# EAGLE board camera_unit (EAGLE 7.5.0)
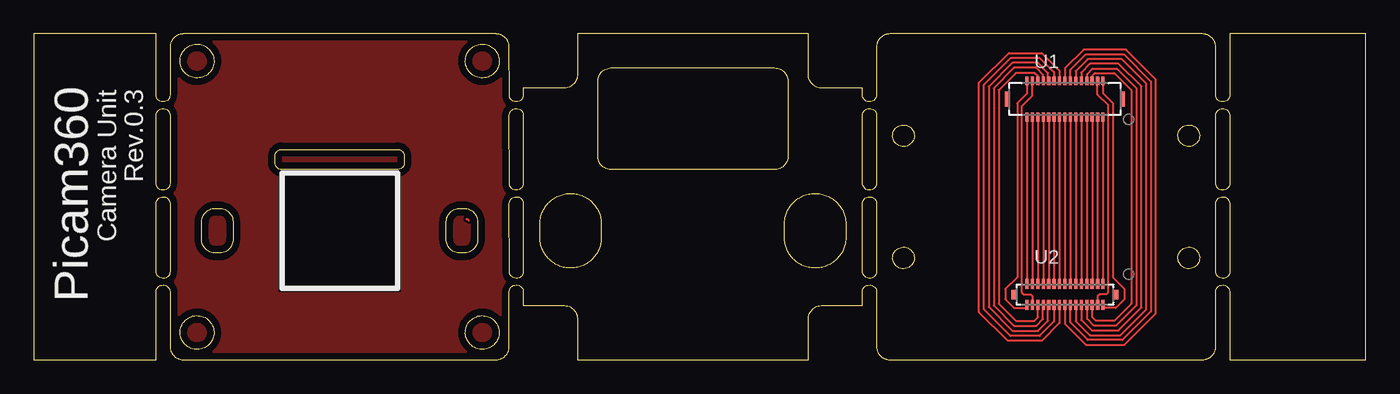
[diagram p0: board, top side]
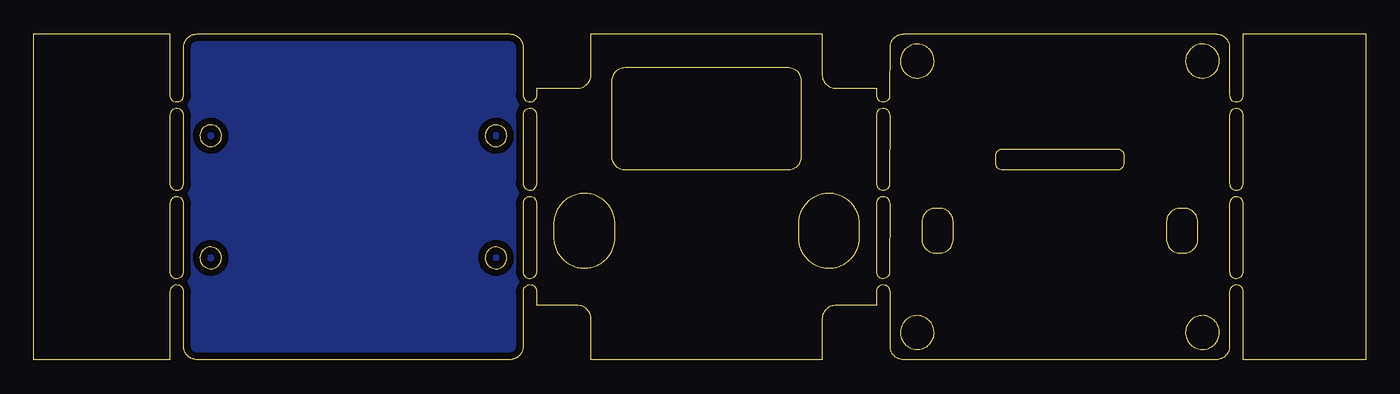
[diagram p1: board, bottom side, seen from below]

Size 98.01 x 24 mm. Coordinates in mm from the lower left corner, seen from the top.
Outline: 8.98,5.01 8.99,5.09 9.03,5.21 9.09,5.31 9.17,5.4 9.28,5.46 9.39,5.49 9.53,5.5 9.58,5.5 9.69,5.47 9.8,5.42 9.89,5.34 9.96,5.24 10,5.13 10.02,5.01 10.02,0.83 10.03,0.75 10.05,0.69 10.07,0.63 10.1,0.57 10.12,0.52 10.16,0.46 10.19,0.41 10.23,0.36 10.27,0.32 10.32,0.27 10.36,0.23 10.41,0.19 10.46,0.16 10.52,0.12 10.57,0.1 10.63,0.07 10.69,0.05 10.75,0.03 10.81,0.02 10.88,0.01 10.94,0 11,0 34,0 34.06,0 34.12,0.01 34.19,0.02 34.25,0.03 34.31,0.05 34.37,0.07 34.43,0.1 34.48,0.12 34.54,0.16 34.59,0.19 34.64,0.23 34.68,0.27 34.73,0.32 34.77,0.36 34.81,0.41 34.84,0.46 34.88,0.52 34.91,0.57 34.93,0.63 34.95,0.69 34.97,0.75 34.98,0.81 34.99,0.85 34.98,5.01 34.99,5.09 35.03,5.21 35.09,5.31 35.17,5.4 35.28,5.46 35.39,5.49 35.52,5.5 35.58,5.5 35.69,5.47 35.8,5.42 35.89,5.34 35.96,5.24 36,5.13 36.02,5.01 36.02,4 39.05,4 39.17,3.98 39.29,3.96 39.41,3.91 39.52,3.86 39.62,3.79 39.71,3.71 39.79,3.62 39.86,3.52 39.91,3.41 39.96,3.29 39.98,3.17 40,3.05 40,3 40,0 57,0 57,3 57,3.05 57.02,3.17 57.04,3.29 57.09,3.41 57.14,3.52 57.21,3.62 57.29,3.71 57.38,3.79 57.48,3.86 57.59,3.91 57.71,3.96 57.83,3.98 57.95,4 60.99,4 60.98,5.01 60.99,5.09 61.03,5.21 61.09,5.31 61.17,5.4 61.28,5.46 61.39,5.49 61.52,5.5 61.58,5.5 61.69,5.47 61.8,5.42 61.89,5.34 61.96,5.24 62,5.13 62.02,5.01 62.02,0.83 62.03,0.75 62.05,0.69 62.07,0.63 62.09,0.57 62.12,0.52 62.16,0.46 62.19,0.41 62.23,0.36 62.27,0.32 62.32,0.27 62.36,0.23 62.41,0.19 62.46,0.16 62.52,0.12 62.57,0.1 62.63,0.07 62.69,0.05 62.75,0.03 62.81,0.02 62.88,0.01 62.94,0 63,0 86,0 86.06,0 86.12,0.01 86.19,0.02 86.25,0.03 86.31,0.05 86.37,0.07 86.43,0.1 86.48,0.12 86.54,0.16 86.59,0.19 86.64,0.23 86.68,0.27 86.73,0.32 86.77,0.36 86.81,0.41 86.84,0.46 86.88,0.52 86.91,0.57 86.93,0.63 86.95,0.69 86.97,0.75 86.98,0.81 86.99,0.85 86.98,5.01 86.99,5.09 87.03,5.21 87.09,5.31 87.17,5.4 87.28,5.46 87.39,5.49 87.53,5.5 87.58,5.5 87.69,5.47 87.8,5.42 87.89,5.34 87.96,5.24 88,5.13 88.02,5.01 88.02,0 98.01,0 98.01,24 88.02,24 88.02,19.49 88.01,19.41 87.97,19.29 87.91,19.19 87.83,19.1 87.72,19.04 87.61,19.01 87.47,19 87.36,19.01 87.25,19.05 87.15,19.12 87.07,19.21 87.02,19.31 86.99,19.43 86.99,23.16 86.98,23.19 86.97,23.25 86.95,23.31 86.93,23.37 86.91,23.43 86.88,23.48 86.84,23.54 86.81,23.59 86.77,23.64 86.73,23.68 86.68,23.73 86.64,23.77 86.59,23.81 86.54,23.84 86.48,23.88 86.43,23.91 86.37,23.93 86.31,23.95 86.25,23.97 86.19,23.98 86.12,23.99 86.06,24 86,24 63,24 62.94,24 62.88,23.99 62.81,23.98 62.75,23.97 62.69,23.95 62.63,23.93 62.57,23.91 62.52,23.88 62.46,23.84 62.41,23.81 62.36,23.77 62.32,23.73 62.27,23.68 62.23,23.64 62.19,23.59 62.16,23.54 62.12,23.48 62.09,23.43 62.07,23.37 62.05,23.31 62.03,23.25 62.02,23.17 62.02,19.49 62.01,19.41 61.97,19.29 61.91,19.19 61.83,19.1 61.72,19.04 61.61,19.01 61.48,19 61.37,19.01 61.25,19.05 61.15,19.12 61.07,19.21 61.02,19.31 60.99,19.43 60.99,20 58,20 57.95,20 57.83,20.02 57.71,20.04 57.59,20.09 57.48,20.14 57.38,20.21 57.29,20.29 57.21,20.38 57.14,20.48 57.09,20.59 57.04,20.71 57.02,20.83 57,20.95 57,24 40,24 40,20.95 39.98,20.83 39.96,20.71 39.91,20.59 39.86,20.48 39.79,20.38 39.71,20.29 39.62,20.21 39.52,20.14 39.41,20.09 39.29,20.04 39.17,20.02 39.05,20 39,20 36.02,20 36.02,19.49 36.01,19.41 35.97,19.29 35.91,19.19 35.83,19.1 35.72,19.04 35.61,19.01 35.48,19 35.37,19.01 35.25,19.05 35.15,19.12 35.07,19.21 35.02,19.31 34.99,19.43 34.99,23.16 34.98,23.19 34.97,23.25 34.95,23.31 34.93,23.37 34.91,23.43 34.88,23.48 34.84,23.54 34.81,23.59 34.77,23.64 34.73,23.68 34.68,23.73 34.64,23.77 34.59,23.81 34.54,23.84 34.48,23.88 34.43,23.91 34.37,23.93 34.31,23.95 34.25,23.97 34.19,23.98 34.12,23.99 34.06,24 34,24 11,24 10.94,24 10.88,23.99 10.81,23.98 10.75,23.97 10.69,23.95 10.63,23.93 10.57,23.91 10.52,23.88 10.46,23.84 10.41,23.81 10.36,23.77 10.32,23.73 10.27,23.68 10.23,23.64 10.19,23.59 10.16,23.54 10.12,23.48 10.1,23.43 10.07,23.37 10.05,23.31 10.03,23.25 10.02,23.17 10.02,19.49 10.01,19.41 9.97,19.29 9.91,19.19 9.83,19.1 9.72,19.04 9.61,19.01 9.47,19 9.37,19.01 9.25,19.05 9.15,19.12 9.07,19.21 9.02,19.31 8.99,19.43 8.98,24 0,24 0,0 8.99,0 8.98,5.01
Outline: 11.91,20.75 11.78,20.77 11.65,20.8 11.53,20.84 11.41,20.9 11.3,20.96 11.2,21.04 11.1,21.13 11.02,21.23 10.94,21.34 10.88,21.45 10.82,21.57 10.79,21.7 10.76,21.83 10.75,21.96 10.75,22.09 10.77,22.22 10.8,22.34 10.84,22.47 10.9,22.59 10.96,22.7 11.04,22.8 11.13,22.9 11.23,22.98 11.34,23.06 11.45,23.12 11.57,23.18 11.7,23.21 11.83,23.24 11.96,23.25 12.09,23.25 12.22,23.23 12.35,23.2 12.47,23.16 12.59,23.1 12.7,23.04 12.8,22.96 12.9,22.87 12.98,22.77 13.06,22.66 13.12,22.55 13.18,22.43 13.21,22.3 13.24,22.17 13.25,22.04 13.25,21.91 13.23,21.78 13.2,21.66 13.16,21.53 13.1,21.41 13.04,21.3 12.96,21.2 12.87,21.1 12.77,21.02 12.66,20.94 12.55,20.88 12.43,20.82 12.3,20.79 12.17,20.76 12.04,20.75 11.91,20.75
Outline: 32.91,20.75 32.78,20.77 32.66,20.8 32.53,20.84 32.41,20.9 32.3,20.96 32.2,21.04 32.1,21.13 32.02,21.23 31.94,21.34 31.88,21.45 31.82,21.57 31.79,21.7 31.76,21.83 31.75,21.96 31.75,22.09 31.77,22.22 31.8,22.34 31.84,22.47 31.9,22.59 31.96,22.7 32.04,22.8 32.13,22.9 32.23,22.98 32.34,23.06 32.45,23.12 32.57,23.18 32.7,23.21 32.83,23.24 32.96,23.25 33.09,23.25 33.22,23.23 33.34,23.2 33.47,23.16 33.59,23.1 33.7,23.04 33.8,22.96 33.9,22.87 33.98,22.77 34.06,22.66 34.12,22.55 34.17,22.43 34.21,22.3 34.24,22.17 34.25,22.04 34.25,21.91 34.23,21.78 34.2,21.66 34.16,21.53 34.1,21.41 34.04,21.3 33.96,21.2 33.87,21.1 33.77,21.02 33.66,20.94 33.55,20.88 33.43,20.82 33.3,20.79 33.17,20.76 33.04,20.75 32.91,20.75
Outline: 42.45,14 42.33,14.02 42.21,14.04 42.09,14.09 41.98,14.14 41.88,14.21 41.79,14.29 41.71,14.38 41.64,14.48 41.59,14.59 41.54,14.71 41.52,14.83 41.5,14.95 41.5,20.5 41.5,20.55 41.52,20.67 41.54,20.79 41.59,20.91 41.64,21.02 41.71,21.12 41.79,21.21 41.88,21.29 41.98,21.36 42.09,21.41 42.21,21.46 42.33,21.48 42.45,21.5 54.5,21.5 54.6,21.5 54.73,21.47 54.84,21.44 54.95,21.39 55.06,21.33 55.16,21.25 55.24,21.17 55.32,21.07 55.38,20.97 55.43,20.86 55.47,20.74 55.49,20.62 55.5,20.5 55.5,15 55.5,14.95 55.48,14.83 55.46,14.71 55.41,14.59 55.36,14.48 55.29,14.38 55.21,14.29 55.12,14.21 55.02,14.14 54.91,14.09 54.79,14.04 54.67,14.02 54.55,14 42.5,14 42.45,14
Outline: 35.37,12.51 35.25,12.55 35.15,12.62 35.07,12.71 35.02,12.81 34.99,12.93 34.98,18.01 34.99,18.09 35.03,18.21 35.09,18.31 35.17,18.4 35.28,18.46 35.39,18.49 35.52,18.5 35.58,18.5 35.69,18.47 35.8,18.42 35.89,18.34 35.96,18.24 36,18.13 36.02,18.01 36.02,12.99 36.01,12.9 35.97,12.79 35.91,12.69 35.83,12.6 35.72,12.54 35.61,12.51 35.48,12.5 35.37,12.51
Outline: 61.37,12.51 61.25,12.55 61.15,12.62 61.07,12.71 61.02,12.81 60.99,12.93 60.98,18.01 60.99,18.09 61.03,18.21 61.09,18.31 61.17,18.4 61.28,18.46 61.39,18.49 61.52,18.5 61.58,18.5 61.69,18.47 61.8,18.42 61.89,18.34 61.96,18.24 62,18.13 62.02,18.01 62.02,12.99 62.01,12.9 61.97,12.79 61.91,12.69 61.83,12.6 61.72,12.54 61.61,12.51 61.48,12.5 61.37,12.51
Outline: 9.37,12.51 9.25,12.55 9.15,12.62 9.07,12.71 9.02,12.81 8.99,12.93 8.98,18.01 8.99,18.09 9.03,18.21 9.09,18.31 9.17,18.4 9.28,18.46 9.39,18.49 9.53,18.5 9.58,18.5 9.69,18.47 9.8,18.42 9.89,18.34 9.96,18.24 10,18.13 10.02,18.01 10.02,12.99 10.01,12.9 9.97,12.79 9.91,12.69 9.83,12.6 9.72,12.54 9.61,12.51 9.47,12.5 9.37,12.51
Outline: 87.36,12.51 87.25,12.55 87.15,12.62 87.07,12.71 87.02,12.81 86.99,12.93 86.98,18.01 86.99,18.09 87.03,18.21 87.09,18.31 87.17,18.4 87.28,18.46 87.39,18.49 87.53,18.5 87.58,18.5 87.69,18.47 87.8,18.42 87.89,18.34 87.96,18.24 88,18.13 88.02,18.01 88.02,12.99 88.01,12.9 87.97,12.79 87.91,12.69 87.83,12.6 87.72,12.54 87.61,12.51 87.47,12.5 87.36,12.51
Outline: 84.9,15.71 84.78,15.73 84.66,15.78 84.55,15.84 84.45,15.91 84.37,16.01 84.3,16.11 84.25,16.23 84.22,16.35 84.2,16.47 84.21,16.6 84.23,16.72 84.28,16.84 84.34,16.95 84.42,17.05 84.51,17.13 84.61,17.2 84.73,17.25 84.85,17.29 84.97,17.3 85.1,17.29 85.22,17.27 85.34,17.23 85.45,17.16 85.55,17.09 85.63,16.99 85.7,16.89 85.75,16.77 85.78,16.65 85.8,16.53 85.79,16.4 85.77,16.28 85.72,16.16 85.66,16.05 85.58,15.95 85.49,15.87 85.39,15.8 85.27,15.75 85.15,15.71 85.03,15.7 84.9,15.71
Outline: 63.9,15.71 63.78,15.73 63.66,15.78 63.55,15.84 63.45,15.91 63.37,16.01 63.3,16.11 63.25,16.23 63.22,16.35 63.2,16.47 63.21,16.6 63.23,16.72 63.27,16.84 63.34,16.95 63.41,17.05 63.51,17.13 63.61,17.2 63.73,17.25 63.85,17.29 63.97,17.3 64.1,17.29 64.22,17.27 64.34,17.23 64.45,17.16 64.55,17.09 64.63,16.99 64.7,16.89 64.75,16.77 64.78,16.65 64.8,16.53 64.79,16.4 64.77,16.28 64.72,16.16 64.66,16.05 64.58,15.95 64.49,15.87 64.39,15.8 64.27,15.75 64.15,15.71 64.03,15.7 63.9,15.71
Outline: 18.14,14.01 18.02,14.05 17.92,14.12 17.84,14.21 17.78,14.32 17.75,14.44 17.75,15 17.76,15.11 17.8,15.23 17.87,15.33 17.96,15.41 18.07,15.47 18.19,15.5 26.75,15.5 26.8,15.5 26.92,15.47 27.03,15.41 27.12,15.34 27.19,15.23 27.23,15.12 27.25,15 27.25,14.5 27.24,14.39 27.2,14.27 27.13,14.17 27.04,14.09 26.93,14.03 26.81,14 18.25,14 18.14,14.01
Outline: 39.42,6.75 39.3,6.76 39.18,6.77 39.07,6.79 38.95,6.82 38.84,6.85 38.73,6.89 38.62,6.93 38.51,6.98 38.4,7.03 38.3,7.09 38.2,7.16 38.11,7.23 38.02,7.3 37.93,7.38 37.85,7.46 37.77,7.55 37.7,7.65 37.63,7.74 37.57,7.84 37.51,7.94 37.46,8.05 37.41,8.16 37.37,8.27 37.33,8.38 37.3,8.49 37.28,8.61 37.26,8.73 37.25,8.84 37.24,8.96 37.24,10.04 37.25,10.16 37.26,10.27 37.28,10.39 37.3,10.51 37.33,10.62 37.37,10.73 37.41,10.84 37.46,10.95 37.51,11.06 37.57,11.16 37.63,11.26 37.7,11.35 37.77,11.45 37.85,11.53 37.93,11.62 38.02,11.7 38.11,11.77 38.2,11.84 38.3,11.91 38.4,11.97 38.51,12.02 38.62,12.07 38.73,12.11 38.84,12.15 38.95,12.18 39.07,12.21 39.18,12.23 39.3,12.24 39.42,12.25 39.54,12.25 39.66,12.24 39.78,12.23 39.9,12.22 40.01,12.19 40.12,12.16 40.24,12.13 40.35,12.09 40.46,12.04 40.56,11.99 40.66,11.93 40.76,11.87 40.86,11.8 40.95,11.72 41.04,11.65 41.12,11.56 41.2,11.48 41.28,11.38 41.35,11.29 41.41,11.19 41.47,11.09 41.53,10.99 41.58,10.88 41.62,10.77 41.66,10.66 41.69,10.54 41.71,10.43 41.73,10.31 41.75,10.2 41.75,10.08 41.76,10 41.75,8.92 41.75,8.8 41.73,8.69 41.71,8.57 41.69,8.46 41.66,8.34 41.62,8.23 41.58,8.12 41.53,8.01 41.47,7.91 41.41,7.81 41.35,7.71 41.28,7.62 41.2,7.52 41.12,7.44 41.04,7.35 40.95,7.28 40.86,7.2 40.76,7.13 40.66,7.07 40.56,7.01 40.46,6.96 40.35,6.91 40.24,6.87 40.12,6.84 40.01,6.81 39.9,6.78 39.78,6.77 39.66,6.75 39.54,6.75 39.42,6.75
Outline: 57.34,6.75 57.22,6.77 57.1,6.78 56.99,6.81 56.88,6.84 56.76,6.87 56.65,6.91 56.54,6.96 56.44,7.01 56.34,7.07 56.24,7.13 56.14,7.2 56.05,7.28 55.96,7.35 55.88,7.44 55.8,7.52 55.72,7.62 55.65,7.71 55.59,7.81 55.53,7.91 55.47,8.01 55.42,8.12 55.38,8.23 55.34,8.34 55.31,8.46 55.29,8.57 55.27,8.69 55.25,8.8 55.25,8.92 55.24,10 55.25,10.08 55.25,10.2 55.27,10.31 55.29,10.43 55.31,10.54 55.34,10.66 55.38,10.77 55.42,10.88 55.47,10.99 55.53,11.09 55.59,11.19 55.65,11.29 55.72,11.38 55.8,11.48 55.88,11.56 55.96,11.65 56.05,11.72 56.14,11.8 56.24,11.87 56.34,11.93 56.44,11.99 56.54,12.04 56.65,12.09 56.76,12.13 56.88,12.16 56.99,12.19 57.1,12.22 57.22,12.23 57.34,12.24 57.46,12.25 57.58,12.25 57.7,12.24 57.82,12.23 57.93,12.21 58.05,12.18 58.16,12.15 58.27,12.11 58.38,12.07 58.49,12.02 58.6,11.97 58.7,11.91 58.8,11.84 58.89,11.77 58.98,11.7 59.07,11.62 59.15,11.53 59.23,11.45 59.3,11.35 59.37,11.26 59.43,11.16 59.49,11.06 59.54,10.95 59.59,10.84 59.63,10.73 59.67,10.62 59.7,10.51 59.72,10.39 59.74,10.27 59.75,10.16 59.76,10.04 59.76,8.96 59.75,8.84 59.74,8.73 59.72,8.61 59.7,8.49 59.67,8.38 59.63,8.27 59.59,8.16 59.54,8.05 59.49,7.94 59.43,7.84 59.37,7.74 59.3,7.65 59.23,7.55 59.15,7.46 59.07,7.38 58.98,7.3 58.89,7.23 58.8,7.16 58.7,7.09 58.6,7.03 58.49,6.98 58.38,6.93 58.27,6.89 58.16,6.85 58.05,6.82 57.93,6.79 57.82,6.77 57.7,6.76 57.58,6.75 57.46,6.75 57.34,6.75
Outline: 35.37,6.01 35.25,6.05 35.15,6.12 35.07,6.21 35.02,6.31 34.99,6.43 34.98,11.51 34.99,11.6 35.03,11.71 35.09,11.81 35.17,11.9 35.28,11.96 35.39,11.99 35.52,12 35.58,12 35.69,11.97 35.8,11.92 35.89,11.84 35.96,11.74 36,11.63 36.02,11.51 36.02,6.49 36.01,6.41 35.97,6.29 35.91,6.19 35.83,6.1 35.72,6.04 35.61,6.01 35.48,6 35.37,6.01
Outline: 61.37,6.01 61.25,6.05 61.15,6.12 61.07,6.21 61.02,6.31 60.99,6.43 60.98,11.51 60.99,11.6 61.03,11.71 61.09,11.81 61.17,11.9 61.28,11.96 61.39,11.99 61.52,12 61.58,12 61.69,11.97 61.8,11.92 61.89,11.84 61.96,11.74 62,11.63 62.02,11.51 62.02,6.49 62.01,6.41 61.97,6.29 61.91,6.19 61.83,6.1 61.72,6.04 61.61,6.01 61.48,6 61.37,6.01
Outline: 9.37,6.01 9.25,6.05 9.15,6.12 9.07,6.21 9.02,6.31 8.99,6.43 8.98,11.51 8.99,11.6 9.03,11.71 9.09,11.81 9.17,11.9 9.28,11.96 9.39,11.99 9.53,12 9.58,12 9.69,11.97 9.8,11.92 9.89,11.84 9.96,11.74 10,11.63 10.02,11.51 10.02,6.49 10.01,6.41 9.97,6.29 9.91,6.19 9.83,6.1 9.72,6.04 9.61,6.01 9.47,6 9.37,6.01
Outline: 87.36,6.01 87.25,6.05 87.15,6.12 87.07,6.21 87.02,6.31 86.99,6.43 86.98,11.51 86.99,11.6 87.03,11.71 87.09,11.81 87.17,11.9 87.28,11.96 87.39,11.99 87.53,12 87.58,12 87.69,11.97 87.8,11.92 87.89,11.84 87.96,11.74 88,11.63 88.02,11.51 88.02,6.49 88.01,6.41 87.97,6.29 87.91,6.19 87.83,6.1 87.72,6.04 87.61,6.01 87.47,6 87.36,6.01
Outline: 31.3,7.85 31.18,7.87 31.06,7.89 30.94,7.94 30.84,7.99 30.73,8.06 30.64,8.14 30.56,8.23 30.49,8.34 30.44,8.44 30.39,8.56 30.36,8.68 30.35,8.8 30.35,10.19 30.36,10.31 30.39,10.43 30.43,10.54 30.48,10.65 30.55,10.75 30.63,10.85 30.72,10.93 30.82,11 30.93,11.06 31.04,11.1 31.16,11.13 31.28,11.15 31.65,11.15 31.75,11.14 31.88,11.12 31.99,11.09 32.1,11.04 32.21,10.98 32.31,10.9 32.39,10.82 32.47,10.72 32.53,10.62 32.58,10.51 32.62,10.39 32.64,10.27 32.65,10.15 32.65,8.81 32.64,8.69 32.61,8.57 32.57,8.46 32.52,8.35 32.45,8.25 32.37,8.15 32.28,8.07 32.18,8 32.07,7.94 31.96,7.9 31.84,7.87 31.72,7.85 31.35,7.85 31.3,7.85
Outline: 13.28,7.85 13.16,7.87 13.04,7.9 12.93,7.94 12.82,8 12.72,8.07 12.63,8.15 12.55,8.25 12.48,8.35 12.43,8.46 12.39,8.57 12.36,8.69 12.35,8.81 12.35,10.15 12.36,10.27 12.38,10.39 12.42,10.51 12.47,10.62 12.53,10.72 12.61,10.82 12.69,10.9 12.79,10.98 12.9,11.04 13.01,11.09 13.12,11.12 13.24,11.14 13.35,11.15 13.72,11.15 13.84,11.13 13.96,11.1 14.07,11.06 14.18,11 14.28,10.93 14.37,10.85 14.45,10.75 14.52,10.65 14.57,10.54 14.61,10.43 14.64,10.31 14.65,10.19 14.65,8.8 14.63,8.68 14.61,8.56 14.56,8.44 14.51,8.34 14.44,8.23 14.36,8.14 14.27,8.06 14.16,7.99 14.06,7.94 13.94,7.89 13.82,7.87 13.7,7.85 13.65,7.85 13.28,7.85
Outline: 63.9,6.71 63.78,6.73 63.66,6.78 63.55,6.84 63.45,6.92 63.37,7.01 63.3,7.11 63.25,7.23 63.22,7.35 63.2,7.47 63.21,7.6 63.23,7.72 63.27,7.84 63.34,7.95 63.41,8.05 63.51,8.13 63.61,8.2 63.73,8.25 63.85,8.29 63.97,8.3 64.1,8.29 64.22,8.27 64.34,8.22 64.45,8.16 64.55,8.09 64.63,7.99 64.7,7.89 64.75,7.77 64.78,7.65 64.8,7.53 64.79,7.4 64.77,7.28 64.72,7.16 64.66,7.05 64.58,6.95 64.49,6.87 64.39,6.8 64.27,6.75 64.15,6.71 64.03,6.7 63.9,6.71
Outline: 84.9,6.71 84.78,6.73 84.66,6.78 84.55,6.84 84.45,6.92 84.37,7.01 84.3,7.11 84.25,7.23 84.22,7.35 84.2,7.47 84.21,7.6 84.23,7.72 84.28,7.84 84.34,7.95 84.42,8.05 84.51,8.13 84.61,8.2 84.73,8.25 84.85,8.29 84.97,8.3 85.1,8.29 85.22,8.27 85.34,8.22 85.45,8.16 85.55,8.09 85.63,7.99 85.7,7.89 85.75,7.77 85.78,7.65 85.8,7.53 85.79,7.4 85.77,7.28 85.72,7.16 85.66,7.05 85.58,6.95 85.49,6.87 85.39,6.8 85.27,6.75 85.15,6.71 85.03,6.7 84.9,6.71
Outline: 32.91,0.75 32.78,0.77 32.66,0.8 32.53,0.84 32.41,0.9 32.3,0.96 32.2,1.04 32.1,1.13 32.02,1.23 31.94,1.34 31.88,1.45 31.82,1.57 31.79,1.7 31.76,1.83 31.75,1.96 31.75,2.09 31.77,2.22 31.8,2.35 31.84,2.47 31.9,2.59 31.96,2.7 32.04,2.8 32.13,2.9 32.23,2.98 32.34,3.06 32.45,3.12 32.57,3.17 32.7,3.21 32.83,3.24 32.96,3.25 33.09,3.25 33.22,3.23 33.34,3.2 33.47,3.16 33.59,3.1 33.7,3.04 33.8,2.96 33.9,2.87 33.98,2.77 34.06,2.66 34.12,2.55 34.17,2.43 34.21,2.3 34.24,2.17 34.25,2.04 34.25,1.91 34.23,1.78 34.2,1.66 34.16,1.53 34.1,1.41 34.04,1.3 33.96,1.2 33.87,1.1 33.77,1.01 33.66,0.94 33.55,0.88 33.43,0.82 33.3,0.79 33.17,0.76 33.04,0.75 32.91,0.75
Outline: 11.91,0.75 11.78,0.77 11.65,0.8 11.53,0.84 11.41,0.9 11.3,0.96 11.2,1.04 11.1,1.13 11.02,1.23 10.94,1.34 10.88,1.45 10.82,1.57 10.79,1.7 10.76,1.83 10.75,1.96 10.75,2.09 10.77,2.22 10.8,2.35 10.84,2.47 10.9,2.59 10.96,2.7 11.04,2.8 11.13,2.9 11.23,2.98 11.34,3.06 11.45,3.12 11.57,3.17 11.7,3.21 11.83,3.24 11.96,3.25 12.09,3.25 12.22,3.23 12.35,3.2 12.47,3.16 12.59,3.1 12.7,3.04 12.8,2.96 12.9,2.87 12.98,2.77 13.06,2.66 13.12,2.55 13.18,2.43 13.21,2.3 13.24,2.17 13.25,2.04 13.25,1.91 13.23,1.78 13.2,1.66 13.16,1.53 13.1,1.41 13.04,1.3 12.96,1.2 12.87,1.1 12.77,1.01 12.66,0.94 12.55,0.88 12.43,0.82 12.3,0.79 12.17,0.76 12.04,0.75 11.91,0.75
Copper layers (1*16): Top 0.035mm / dielectric 1.6mm / Bottom 0.035mm
Design rules "Elecrow_2-layer_PCB_eagle_rule": minimum track width 6mil, minimum drill 12mil, track to track 6mil, track to pad 6mil, pad to pad 6mil, via to via 8mil, smd to smd 0mil, copper to edge 20mil, drill to drill 10mil, minimum pad ring 6mil, minimum via ring 6mil, stop-mask expansion 0mil, vias tented up to drill 100mil, thermal gap 10mil
tRestrict: area 18,5 to 27,14

## Footprints (pad centres in the part's own frame; a part is rotated, then mirrored left to right if it is on the bottom)
DF37**-30DS-0.4V = smd 0.23 x 0.63: 1 2.8,-1.325; 2 2.8,1.325; 3 2.4,-1.325; 4 2.4,1.325; 5 2,-1.325; 6 2,1.325; 7 1.6,-1.325; 8 1.6,1.325; 9 1.2,-1.325; 10 1.2,1.325; 11 0.8,-1.325; 12 0.8,1.325; 13 0.4,-1.325; 14 0.4,1.325; 15 0,-1.325; 16 0,1.325; 17 -0.4,-1.325; 18 -0.4,1.325; 19 -0.8,-1.325; 20 -0.8,1.325; 21 -1.2,-1.325; 22 -1.2,1.325; 23 -1.6,-1.325; 24 -1.6,1.325; 25 -2,-1.325; 26 -2,1.325; 27 -2.4,-1.325; 28 -2.4,1.325; 29 -2.8,-1.325; 30 -2.8,1.325 | smd 0.38 x 1.1: 44 -4.23,0; 45 4.23,0
DF37**-30DP-0.4V = smd 0.23 x 0.73: 1 2.8,0.775; 2 2.8,-0.775; 3 2.4,0.775; 4 2.4,-0.775; 5 2,0.775; 6 2,-0.775; 7 1.6,0.775; 8 1.6,-0.775; 9 1.2,0.775; 10 1.2,-0.775; 11 0.8,0.775; 12 0.8,-0.775; 13 0.4,0.775; 14 0.4,-0.775; 15 0,0.775; 16 0,-0.775; 17 -0.4,0.775; 18 -0.4,-0.775; 19 -0.8,0.775; 20 -0.8,-0.775; 21 -1.2,0.775; 22 -1.2,-0.775; 23 -1.6,0.775; 24 -1.6,-0.775; 25 -2,0.775; 26 -2,-0.775; 27 -2.4,0.775; 28 -2.4,-0.775; 29 -2.8,0.775; 30 -2.8,-0.775 | smd 0.38 x 0.68: 44 -3.75,0; 45 3.75,0

## Placement (x,y rotation side)
U1  DF37*-30D*-0.4V  [DF37**-30DS-0.4V]  75.89,19.2 0 top
U2  DF37*-30D*-0.4VHEADER  [DF37**-30DP-0.4V]  75.89,4.8 0 top

## Library data of the parts
U1 = openblw; MPN: DF9-41P-1V(32); OC_FARNELL: 1798383; OC_NEWARK: 74R3384; PACKAGE: PLUG, 1MM, 41WAY; SUPPLIER: Hirose
U2 = openblw

## Nets
N$1: U1.2 U2.2
N$2: U1.4 U2.4
N$3: U1.6 U2.6
N$4: U1.8 U2.8
N$5: U1.10 U2.10
N$6: U1.12 U2.12
N$7: U1.14 U2.14
N$8: U1.16 U2.16
N$9: U1.18 U2.18
N$10: U1.20 U2.20
N$11: U1.22 U2.22
N$12: U1.24 U2.24
N$13: U1.26 U2.26
N$14: U1.28 U2.28
N$15: U1.30 U2.30
N$16: U1.1 U2.1
N$17: U1.3 U2.3
N$18: U1.5 U2.5
N$19: U1.7 U2.7
N$20: U1.9 U2.9
N$21: U1.11 U2.11
N$22: U1.13 U2.13
N$23: U1.15 U2.15
N$24: U1.29 U2.29
N$25: U1.27 U2.27
N$26: U1.25 U2.25
N$27: U1.23 U2.23
N$28: U1.21 U2.21
N$29: U1.19 U2.19
N$30: U1.17 U2.17

## Tracks (layer width: path | path; a pad name or v marks a point on that pad's centre or on a via)
GND
  Top 0.152: 32,10.25 31.84,10.37
N$1
  Top 0.152: U1.2 78.69,19.64 79.42,18.9 79.42,6.05 80.26,5.21 80.26,4.45 79.63,3.81 78.74,3.81 U2.2
N$2
  Top 0.152: 78.27,4.14 U2.4 78.28,4.66 78.45,4.83 78.92,4.83 79.07,4.98 79.07,18.75 78.28,19.54 U1.4
N$3
  Top 0.152: U2.6 77.89,3.76 77.89,3.12 78.14,2.88 79.52,2.88 80.77,4.12 80.77,19.88 79.52,21.12 78.09,21.12 77.89,20.93 77.89,20.62 U1.6
N$4
  Top 0.152: U2.8 77.52,3.88 77.52,3 78.02,2.5 79.64,2.5 81.14,4 81.14,20 79.69,21.45 77.92,21.45 77.52,21.05 77.52,20.62 U1.8
N$5
  Top 0.152: U2.10 77.08,2.94 77.87,2.15 79.82,2.15 81.52,3.85 81.52,20.15 79.82,21.8 77.72,21.8 77.08,21.16 U1.10
N$6
  Top 0.152: U2.12 76.69,2.83 77.72,1.8 79.97,1.8 81.87,3.7 81.87,20.35 80.07,22.15 77.57,22.15 76.69,21.27 U1.12
N$7
  Top 0.152: U1.14 76.28,21.36 77.42,22.5 80.22,22.5 82.22,20.5 82.22,3.55 80.12,1.45 77.57,1.45 76.28,2.73 U2.14
N$8
  Top 0.152: U2.16 75.89,2.63 77.42,1.1 80.27,1.1 82.57,3.4 82.57,20.65 80.37,22.85 77.27,22.85 75.89,21.46 U1.16
N$9
  Top 0.152: U2.18 75.48,2.71 74.17,1.4 71.67,1.4 69.57,3.5 69.57,20.4 71.77,22.6 74.17,22.6 75.48,21.29 U1.18
N$10
  Top 0.152: U2.20 75.08,2.81 74.02,1.75 71.87,1.75 69.92,3.7 69.92,20.25 71.92,22.25 74.02,22.25 75.08,21.18 U1.20
N$11
  Top 0.152: U2.22 74.64,3.88 74.64,2.88 73.89,2.12 72.02,2.12 70.27,3.88 70.27,20.12 72.02,21.88 73.89,21.88 74.64,21.12 74.64,20.62 U1.22
N$12
  Top 0.152: U2.24 74.27,3.76 74.27,3 73.77,2.5 72.14,2.5 70.64,4 70.64,20 72.14,21.5 73.77,21.5 74.27,21 74.27,20.62 U1.24
N$13
  Top 0.152: U2.26 73.89,3.88 73.89,3.12 73.64,2.88 72.27,2.88 71.02,4.12 71.02,19.88 72.27,21.12 73.64,21.12 73.89,20.88 73.89,20.62 U1.26
N$14
  Top 0.152: U1.28 73.48,19.46 72.72,18.7 72.72,4.94 72.85,4.81 73.37,4.81 73.48,4.7 U2.28
N$15
  Top 0.152: U1.30 73.08,19.61 72.37,18.9 72.37,6.08 71.5,5.21 71.5,4.45 72.14,3.81 73.03,3.81 U2.30
N$16
  Top 0.152: U1.1 U2.1
N$17
  Top 0.152: U1.3 U2.3
N$18
  Top 0.152: U1.5 U2.5
N$19
  Top 0.152: U1.7 U2.7
N$20
  Top 0.152: U1.9 U2.9
N$21
  Top 0.152: U1.11 U2.11
N$22
  Top 0.152: U1.13 U2.13
N$23
  Top 0.152: U1.15 U2.15
N$24
  Top 0.152: U1.29 U2.29
N$25
  Top 0.152: U1.27 U2.27
N$26
  Top 0.152: U1.25 U2.25
N$27
  Top 0.152: U1.23 U2.23
N$28
  Top 0.152: U1.21 U2.21
N$29
  Top 0.152: U1.19 U2.19
N$30
  Top 0.152: U1.17 U2.17
N$31
  pour Top: 10.02,24 34.98,24 34.98,0 10.02,0
  pour Bottom: 62.02,24 86.98,24 86.98,0 62.02,0

## Text on the board
tPlace: Picam360 | Camera Unit | Rev.0.3